# Altium PCB AD9288.PcbDoc
Units mil, origin at the board's own origin, x right, y up, seen from the top; angles counter-clockwise.
Board outline 2660 x 1500 mil, 2 copper layers (Top Layer, Bottom Layer); 37 components, 46 nets, 149 pads, 336 vias.
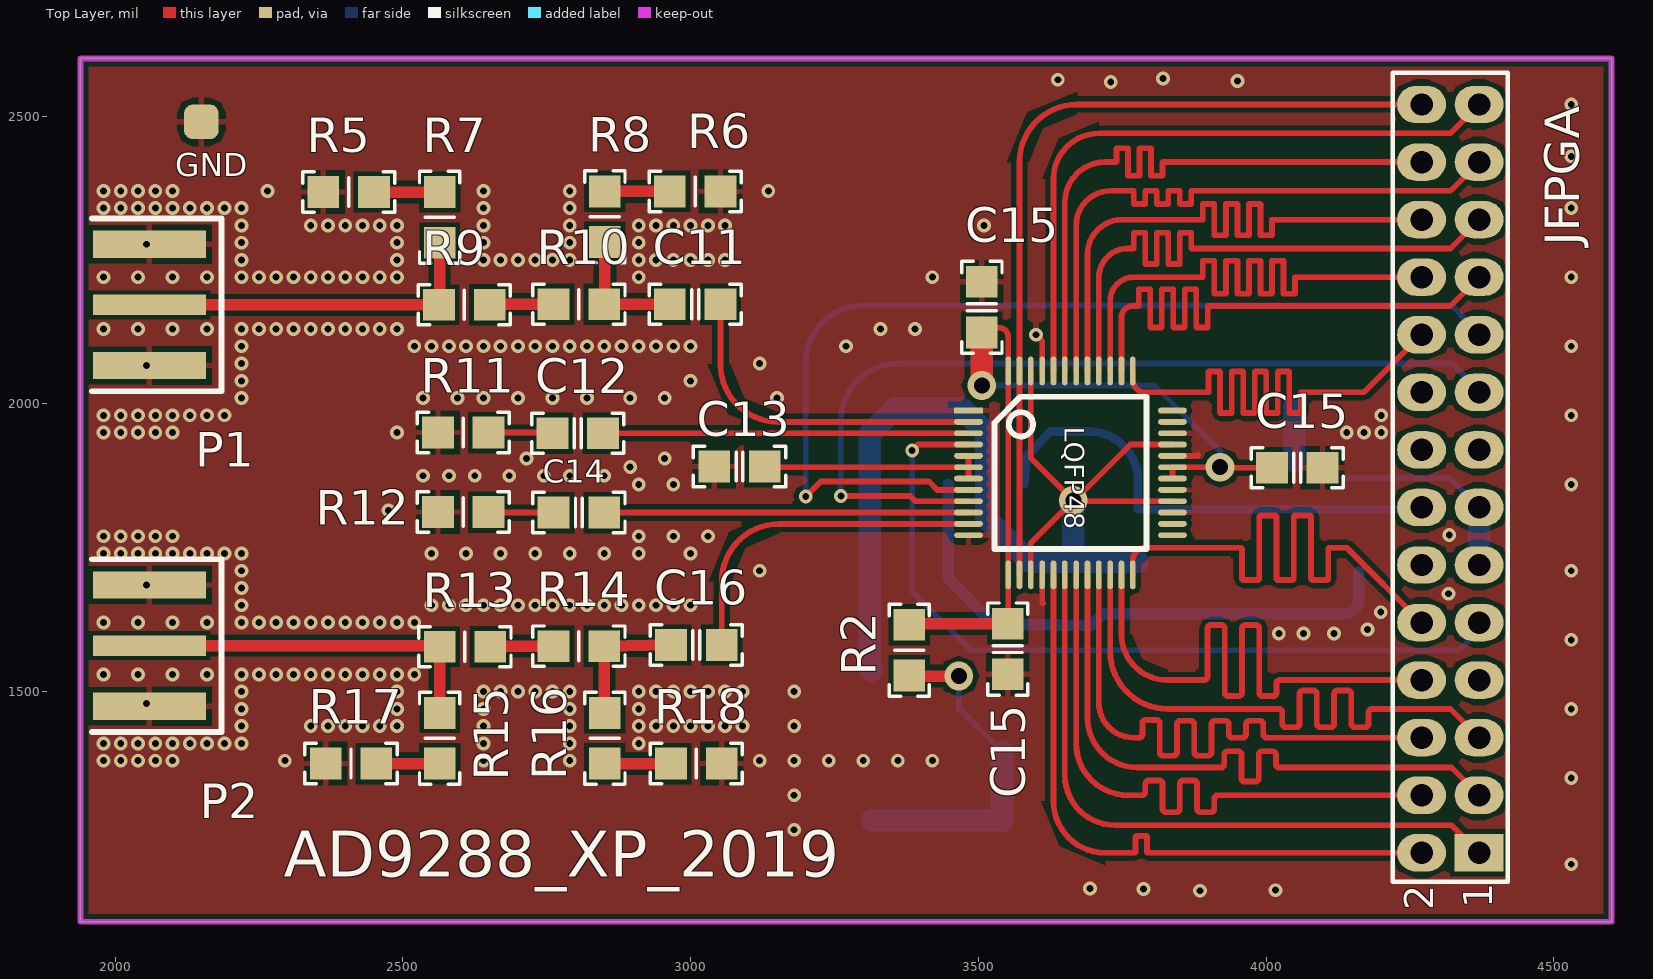
[diagram p0: Top Layer view]
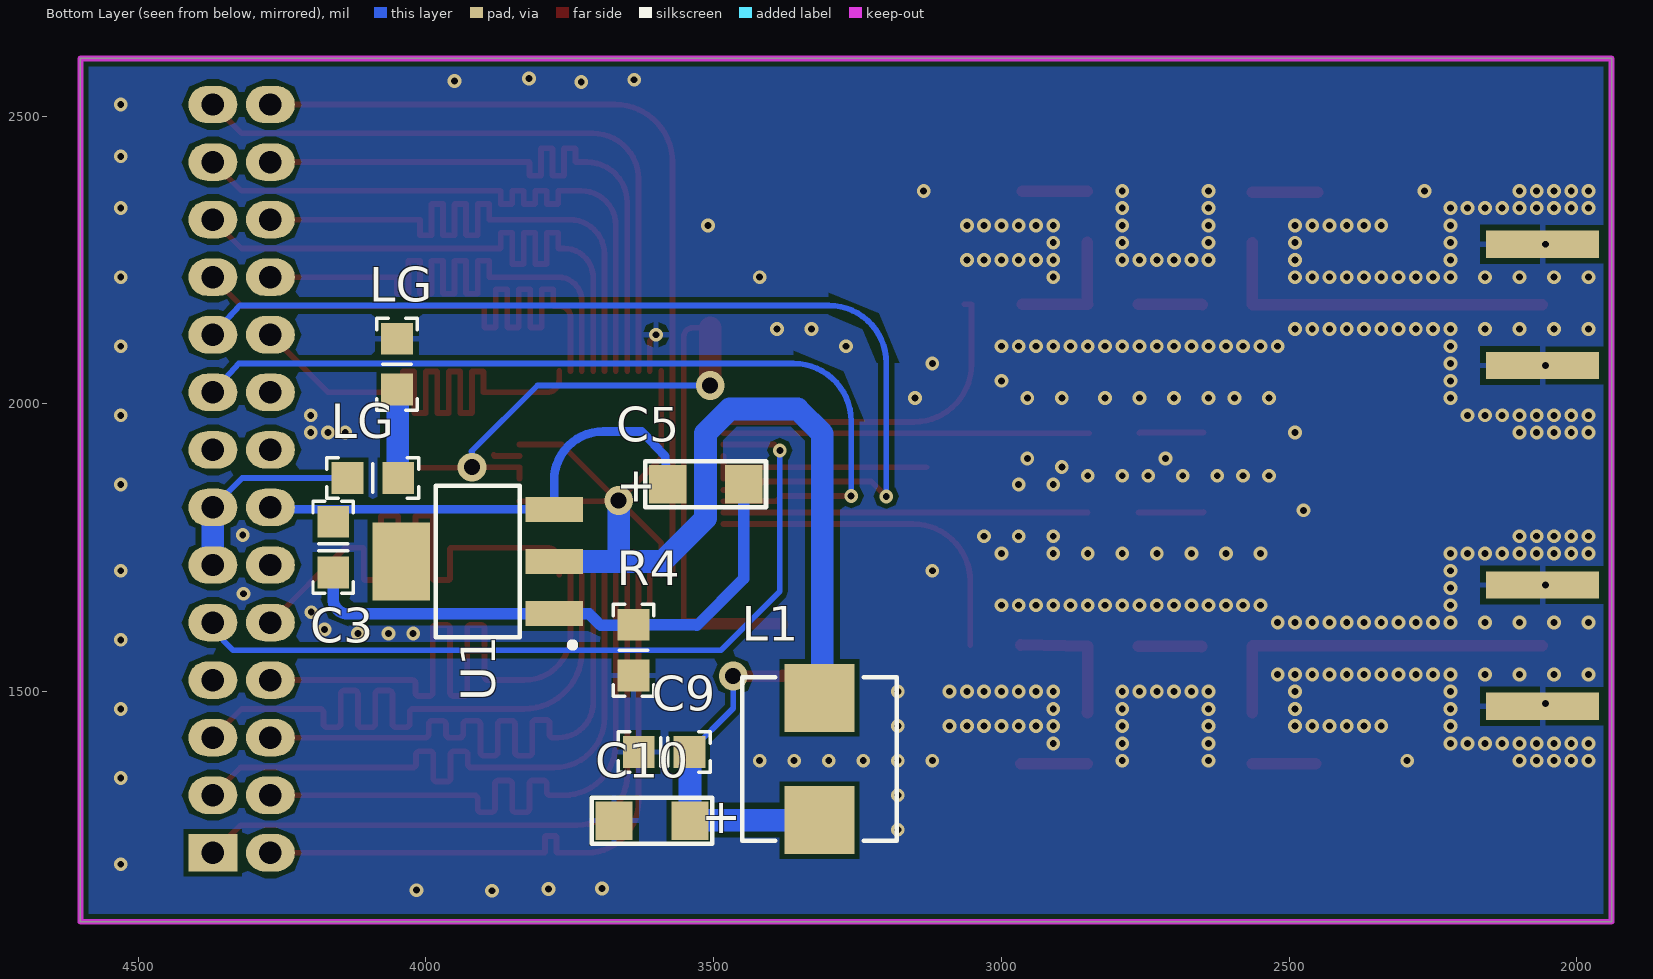
[diagram p1: Bottom Layer view, seen from below]
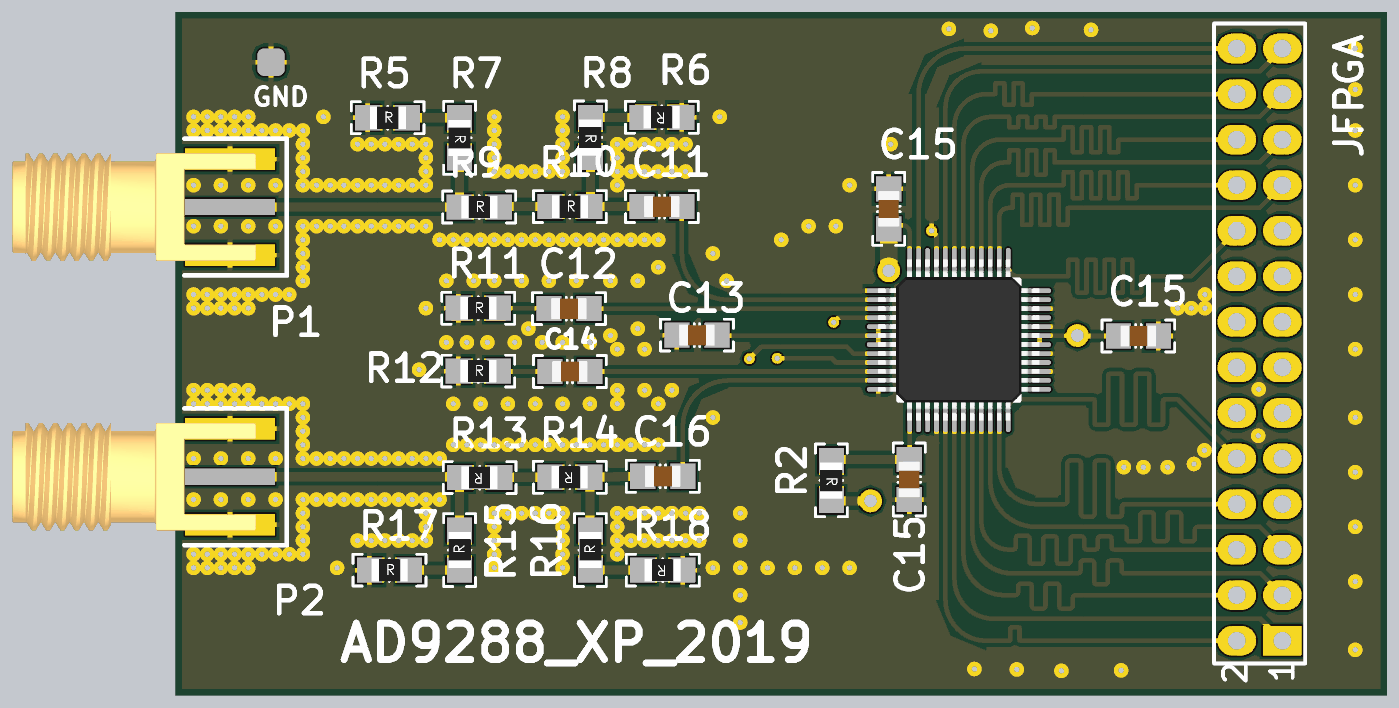
[diagram p2: 3D render of the assembled board from above, using the file's embedded part models]
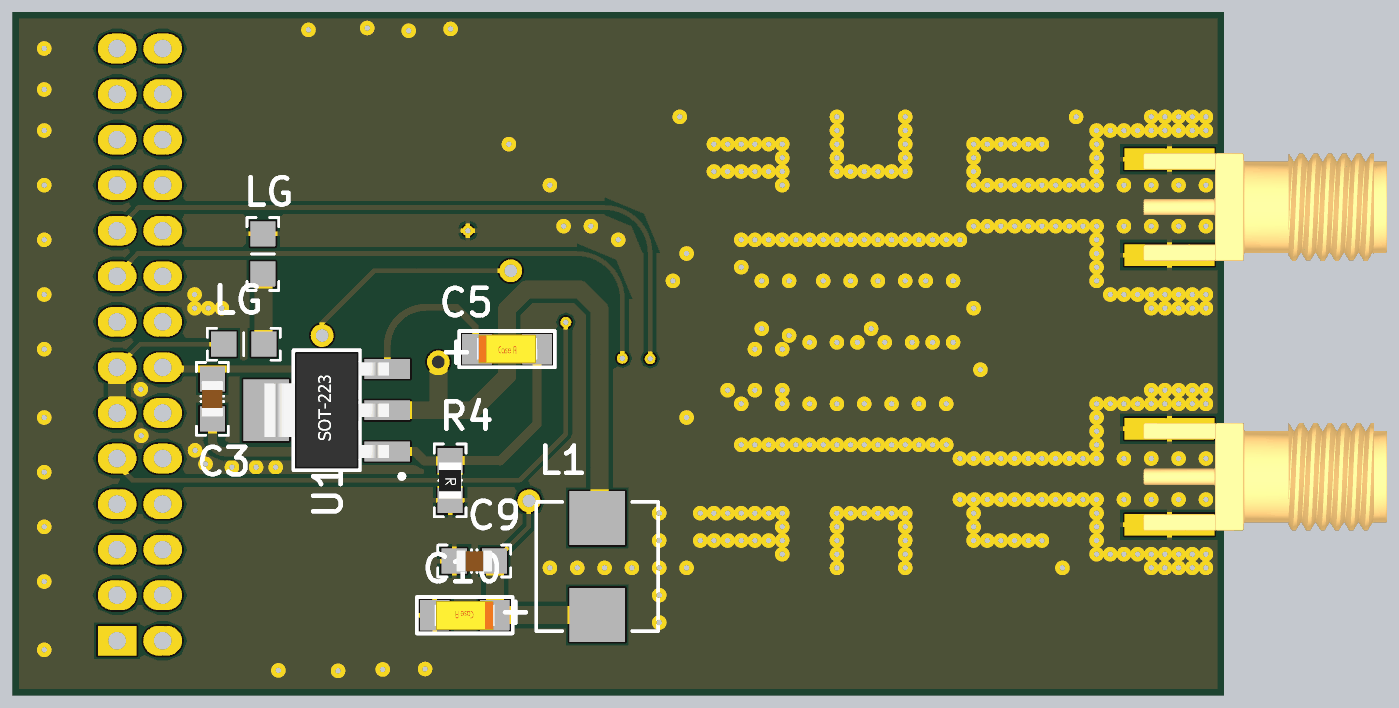
[diagram p3: 3D render of the assembled board from below, using the file's embedded part models]

## Layer stack, top to bottom
Top Solder: solder mask 0.4, Solder Resist, Dk 3.5
Top Layer: signal copper 1.4
Dielectric 1: dielectric 12.6, FR-4, Dk 4.8
Bottom Layer: signal copper 1.4
Bottom Solder: solder mask 0.4, Solder Resist, Dk 3.5

## Board outline
1940,1100 4600,1100 4600,2600 1940,2600

## Design rules (kind name [scope] priority, off if disabled: settings)
Clearance [All] p1: gap=8
Length "InNet('D6A') Or InNet('D7A')" [InNet('D7A')] p1: maxlimit=1138.2 minlimit=0
PolygonConnect [All] p1: connectstyle=Relief reliefconductorwidth=10 reliefentries=4 polygonreliefangle="90 Angle" airgapwidth=10
RoutingVias [All] p1: holewidth=28 width=50 viastyle="Through Hole" minholewidth=28 minwidth=50 maxholewidth=28 maxwidth=50
SolderMaskExpansion [All] p1: expansion=4
UnpouredPolygon [All] p1: allowunpoured=FALSE
Width [All] p1: maxlimit=78.74 minlimit=10 preferedwidth=10
29 further rules are at their usual default settings.

## Classes and differential pairs
component class AD9288: AD9288_XP_2019 C3 C5 C9 C10 C11 C12 C13 C14 C15 C16 JFPGA L1 LG P1 P2 R2 R4 R5 R6 R7 R8 R9 R10 R11 R12 R13 R14 R15 R16 R17 R18 U1

## Components (designator, comment, footprint, x,y, rotation, side; value= is the part's Value field where it differs from the comment)
AD9288_XP_2019 "AD9288" LQFP-48 3660,1880 r270 top (schematic designator U2)
C3 "10uf" 0805-CAP 4161,1751 r90 bottom
C5 "226" CAP_3216_A[1206] 3514,1860 r180 bottom
C9 "104" 0805-CAP 3586,1395 r180 bottom
C10 "226" CAP_3216_A[1206] 3607,1276 r0 bottom
C11 "104" 0805-CAP 3008,2173 r0 top
C12 "104" 0805-CAP 2804,1949 r0 top
C13 "104" 0805-CAP 3085,1891 r0 top
C14 "104" 0805-CAP 2806,1811 r0 top
C15 "104" 0805-CAP 3506,2168 r90 top
C15 "104" 0805-CAP 3551,1574 r270 top
C15 "104" 0805-CAP 4054,1889 r0 top
C16 "104" 0805-CAP 3010,1581 r0 top
GND "Comment" TP-1.52MM 2150,2490 r0 top
JFPGA "Header2x14" HEADER2X14 4320,1870 r90 top (schematic designator J?)
L1 "L-0630Power" IND-PWR-0630 3316,1383 r90 bottom
LG "10nH" 0805-IND 4050,2069 r270 bottom
LG "10nH" 0805-IND 4092,1871 r0 bottom
P1 "RF-SMA" RFCON_SMA-EDGE 2060,2172 r90 top
P2 "RF-SMA" RFCON_SMA-EDGE 2060,1580 r90 top
R2 "0" 0805-RES 3380,1572 r270 top
R4 "0" 0805-RES 3639,1572 r270 bottom
R5 "0" 0805-RES 2406,2368 r0 top
R6 "0" 0805-RES 3008,2369 r180 top
R7 "584" 0805-RES 2564,2324 r270 top
R8 "584" 0805-RES 2851,2325 r270 top
R9 "352" 0805-RES 2607,2172 r0 top
R10 "0" 0805-RES 2806,2173 r0 top
R11 "100" 0805-RES 2605,1950 r0 top
R12 "100" 0805-RES 2605,1812 r0 top
R13 "0" 0805-RES 2608,1578 r180 top
R14 "352" 0805-RES 2806,1579 r180 top
R15 "584" 0805-RES 2564,1419 r90 top
R16 "584" 0805-RES 2851,1419 r90 top
R17 "0" 0805-RES 2410,1375 r0 top
R18 "0" 0805-RES 3010,1375 r180 top
U1 "LM1117" SOT-223 3910,1726 r180 bottom

## Footprints (in the part's own frame and the unit in brackets; to place one, negate y for a bottom-side part, rotate by r counter-clockwise, add the part's x,y. Pads: shape width x height; smd on the part's side, far side on the other; paste and mask are expansions set on the pad)
0805-CAP [mm]
  rect 1.4x1.4 smd: 1(-1.118,0) 2(1.118,0)
  silkscreen extent -2.03,-0.89 2.03,0.89, body extent -1,-0.6 1,0.6, height 1.2
0805-IND [mm]
  rect 1.4x1.4 smd: 1(-1.118,0) 2(1.118,0)
  silkscreen extent -2.03,-0.89 2.03,0.89
0805-RES [mm]
  rect 1.4x1.4 smd: 1(-1.118,0) 2(1.118,0)
  silkscreen extent -2.03,-0.89 2.03,0.89, body extent -1.49,-0.7 1.51,0.7, height 0.49
CAP_3216_A[1206] [mil]
  rect 65x66.93 smd: 1(-66,0) 2(66,0)
  silkscreen extent -105,-40 105,40, body extent -67,-31 67,32, height 65
HEADER2X14 [mil]
  rect 65x85 hole 39: 1(-650,-50)
  oval 65x85 hole 39: 2(-650,50) 3(-550,-50) 4(-550,50) 5(-450,-50) 6(-450,50) 7(-350,-50) 8(-350,50) 9(-250,-50) 10(-250,50) 11(-150,-50) 12(-150,50) 13(-50,-50) 14(-50,50) 15(50,-50) 16(50,50) 17(150,-50) 18(150,50) 19(250,-50) 20(250,50) 21(350,-50) 22(350,50) 23(450,-50) 24(450,50) 25(550,-50) 26(550,50) 27(650,-50) 28(650,50)
  silkscreen extent -700,-100 705,100
IND-PWR-0630 [mm] "Precision Wire Wound Inductor, 2-Leads, Body 6.90x6.60mm, IPC Medium Density"
  rect 3x3.1 smd: 1(-2.7,0) 2(2.7,0)
  silkscreen extent -3.6,-3.4 3.6,3.4, body extent -3.6,-3.4 3.6,3.4, height 3
LQFP-48 [mm]
  rect 0.254x1.27 smd: 1(-2.75,-4.5)
  oval 0.254x1.27 smd: 2(-2.25,-4.5) 3(-1.75,-4.5) 4(-1.25,-4.5) 5(-0.75,-4.5) 6(-0.25,-4.5) 7(0.25,-4.5) 8(0.75,-4.5) 9(1.25,-4.5) 10(1.75,-4.5) 11(2.25,-4.5) 12(2.75,-4.5) 25(2.75,4.5) 26(2.25,4.5) 27(1.75,4.5) 28(1.25,4.5) 29(0.75,4.5) 30(0.25,4.5) 31(-0.25,4.5) 32(-0.75,4.5) 33(-1.25,4.5) 34(-1.75,4.5) 35(-2.25,4.5) 36(-2.75,4.5)
  oval 1.27x0.254 smd: 13(4.5,-2.75) 14(4.5,-2.25) 15(4.5,-1.75) 16(4.5,-1.25) 17(4.5,-0.75) 18(4.5,-0.25) 19(4.5,0.25) 20(4.5,0.75) 21(4.5,1.25) 22(4.5,1.75) 23(4.5,2.25) 24(4.5,2.75) 37(-4.5,2.75) 38(-4.5,2.25) 39(-4.5,1.75) 40(-4.5,1.25) 41(-4.5,0.75) 42(-4.5,0.25) 43(-4.5,-0.25) 44(-4.5,-0.75) 45(-4.5,-1.25) 46(-4.5,-1.75) 47(-4.5,-2.25) 48(-4.5,-2.75)
  silkscreen extent -3.36,-3.36 3.36,3.36, body extent -4.51,-4.5 4.49,4.5, height 1.6
RFCON_SMA-EDGE [mm]
  rect 0.9x5 smd: 1(0,0)
  rect 1.2x5 all layers, no hole: 2(-2.675,0) 2(2.675,0)
  silkscreen extent -3.81,-3.18 3.81,2.54, body extent -3,-1.46 3,12.14, height 1.25
SOT-223 [mm] "AMS1117"
  rect 2.54x1.1 smd: 1(3.375,-2.3) 2(3.375,0) 3(3.375,2.3)
  rect 2.54x3.45 smd: 4(-3.375,0)
  silkscreen extent -1.85,-3.81 4.31,3.35, body extent -3.48,-3.25 3.48,3.25, height 1.66
TP-1.52MM [mil]
  rrect50% 60x60 smd: 1(0,0)

## Part data
C3 C9 C11 C12 C13 C14 C15 C15 C15 C16: library part C0805
C5 C10: library part C-Tan, "Tantalum Cap"
L1: library part L-PWR-0630, "一体成型电感"
LG LG: library part L0805
R2 R4 R5 R6 R7 R8 R9 R10 R11 R12 R13 R14 R15 R16 R17 R18: library part R0805, "0805贴片电阻"
U1: library part LM1117_SOT_223

## Via types
v1: diameter 24, hole 12, Top Layer to Bottom Layer, 332 vias
v2: diameter 50, hole 28, Top Layer to Bottom Layer, 4 vias

## Nets (pads, with @x,y where several pads share a name; then routed paths per layer and width w, separated by ;. In a path a pad name is that pad's centre, name@x,y a point inside that pad or via, vN(x,y) a via of type N, cw(c..) or ccw(c..) an arc to the next point about the centre after c; other vN are vias at no path point)
3.3V: AD9288_XP_2019.15 AD9288_XP_2019.28 AD9288_XP_2019.33 AD9288_XP_2019.46 L1.2 U1.2 | length 1999.2
  Top Layer w10: AD9288_XP_2019.15 3591.1,1758.1 v2(3665,1832) ; AD9288_XP_2019.46 3591.1,1905.9 v2(3665,1832) ; AD9288_XP_2019.28 3689.21,1830.79 3689,1831 v2@3666,1831 ; AD9288_XP_2019.33 3764.21,1929.21 v2@3666,1831 ; v2(3665,1832) v2@3666,1831
  Bottom Layer w39.37: L1.2@3315,1537.3 3311,1541.3 3311,1948 3354,1991 3472,1991 3514,1949 3514,1801 3589,1726 3664,1726 ; v2(3665,1832) 3665,1727 3664,1726 ; U1.2 3664,1726
+12.5VV: C3.2 C5.1 JFPGA.14 U1.3 | length 853.9
  Bottom Layer w15: C5.1 3584,1909 3625,1952 3692,1952 cw(c3692,1866.87) 3777.13,1866.87 U1.3 4266.55,1816.55 JFPGA.14
AGND: C3.1 C5.2 R4.1 U1.1 | length 981.1
  Bottom Layer w20: C5.2 3448,1696 3529,1615 3530,1616 R4.1 3640,1615 3696,1615 3716.45,1635.45 U1.1 3777.13,1635 4135,1635 ccw(c4135,1661) 4161,1661 C3.1
D0A: AD9288_XP_2019.37 JFPGA.20 | length 1138.9
  Top Layer w10: AD9288_XP_2019.37 3768.27,2041.73 ccw(c3790,2041.73) 3790,2020 3890,2020 3899,2020 ccw(c3899,2021) 3900,2021 3900,2054.98 cw(c3901,2054.98) 3901,2055.98 3919,2055.98 cw(c3919,2054.98) 3920,2054.98 3920,2020 3920,1985.02 ccw(c3921,1985.02) 3921,1984.02 3939,1984.02 ccw(c3939,1985.02) 3940,1985.02 3940,2020 3940,2054.98 cw(c3941,2054.98) 3941,2055.98 3959,2055.98 cw(c3959,2054.98) 3960,2054.98 3960,2020 3960,1985.02 ccw(c3961,1985.02) 3961,1984.02 3979,1984.02 ccw(c3979,1985.02) 3980,1985.02 3980,2020 3980,2054.98 cw(c3981,2054.98) 3981,2055.98 3999,2055.98 cw(c3999,2054.98) 4000,2054.98 4000,2020 4000,1985.02 ccw(c4001,1985.02) 4001,1984.02 4019,1984.02 ccw(c4019,1985.02) 4020,1985.02 4020,2020 4020,2054.98 cw(c4021,2054.98) 4021,2055.98 4039,2055.98 cw(c4039,2054.98) 4040,2054.98 4040,2020 4040,1985.02 ccw(c4041,1985.02) 4041,1984.02 4059,1984.02 ccw(c4059,1985.02) 4060,1985.02 4060,2019 cw(c4061,2019) 4061,2020 4120,2020 4170,2020 JFPGA.20
D0B: AD9288_XP_2019.24 JFPGA.10 | length 1138.9
  Top Layer w10: AD9288_XP_2019.24 3768.27,1728.27 cw(c3790,1728.27) 3790,1750 3894,1750 3955,1750 cw(c3955,1747) 3958,1747 3958,1696.9 ccw(c3961,1696.9) 3961,1693.9 3985,1693.9 ccw(c3985,1696.9) 3988,1696.9 3988,1750 3988,1803.1 cw(c3991,1803.1) 3991,1806.1 4015,1806.1 cw(c4015,1803.1) 4018,1803.1 4018,1750 4018,1696.9 ccw(c4021,1696.9) 4021,1693.9 4045,1693.9 ccw(c4045,1696.9) 4048,1696.9 4048,1750 4048,1803.1 cw(c4051,1803.1) 4051,1806.1 4075,1806.1 cw(c4075,1803.1) 4078,1803.1 4078,1750 4078,1696.9 ccw(c4081,1696.9) 4081,1693.9 4105,1693.9 ccw(c4105,1696.9) 4108,1696.9 4108,1747 cw(c4111,1747) 4111,1750 4123,1750 4140,1750 JFPGA.10
D1A: AD9288_XP_2019.38 JFPGA.21 | length 1138.9
  Top Layer w10: AD9288_XP_2019.38 3748.58,2150 cw(c3768.58,2150) 3768.58,2170 3777.58,2170 ccw(c3777.58,2171) 3778.58,2171 3778.58,2198.22 cw(c3779.58,2198.22) 3779.58,2199.22 3797.58,2199.22 cw(c3797.58,2198.22) 3798.58,2198.22 3798.58,2170 3798.58,2133.79 ccw(c3799.58,2133.79) 3799.58,2132.79 3817.58,2132.79 ccw(c3817.58,2133.79) 3818.58,2133.79 3818.58,2170 3818.58,2198.22 cw(c3819.58,2198.22) 3819.58,2199.22 3837.58,2199.22 cw(c3837.58,2198.22) 3838.58,2198.22 3838.58,2170 3838.58,2133.79 ccw(c3839.58,2133.79) 3839.58,2132.79 3857.58,2132.79 ccw(c3857.58,2133.79) 3858.58,2133.79 3858.58,2170 3858.58,2198.22 cw(c3859.58,2198.22) 3859.58,2199.22 3877.58,2199.22 cw(c3877.58,2198.22) 3878.58,2198.22 3878.58,2170 3878.58,2133.79 ccw(c3879.58,2133.79) 3879.58,2132.79 3897.58,2132.79 ccw(c3897.58,2133.79) 3898.58,2133.79 3898.58,2169 cw(c3899.58,2169) 3899.58,2170 4110,2170 4320,2170 JFPGA.21
D1B: AD9288_XP_2019.23 JFPGA.8 | length 1138.9
  Top Layer w10: AD9288_XP_2019.23 3748.58,1600 ccw(c3828.58,1600) 3828.58,1520 3883,1520 3892,1520 ccw(c3892,1526) 3898,1526 3898,1609.79 cw(c3904,1609.79) 3904,1615.79 3922,1615.79 cw(c3922,1609.79) 3928,1609.79 3928,1520 3928,1498.21 ccw(c3934,1498.21) 3934,1492.21 3952,1492.21 ccw(c3952,1498.21) 3958,1498.21 3958,1520 3958,1609.79 cw(c3964,1609.79) 3964,1615.79 3982,1615.79 cw(c3982,1609.79) 3988,1609.79 3988,1520 3988,1498.21 ccw(c3994,1498.21) 3994,1492.21 4012,1492.21 ccw(c4012,1498.21) 4018,1498.21 4018,1515 cw(c4023,1515) 4023,1520 JFPGA.8
D2A: AD9288_XP_2019.39 JFPGA.22 | length 1138.9
  Top Layer w10: AD9288_XP_2019.39 3728.9,2178.9 cw(c3770,2178.9) 3770,2220 3880,2220 3889,2220 ccw(c3889,2221) 3890,2221 3890,2247.77 cw(c3891,2247.77) 3891,2248.77 3909,2248.77 cw(c3909,2247.77) 3910,2247.77 3910,2220 3910,2192.23 ccw(c3911,2192.23) 3911,2191.23 3929,2191.23 ccw(c3929,2192.23) 3930,2192.23 3930,2220 3930,2247.77 cw(c3931,2247.77) 3931,2248.77 3949,2248.77 cw(c3949,2247.77) 3950,2247.77 3950,2220 3950,2192.23 ccw(c3951,2192.23) 3951,2191.23 3969,2191.23 ccw(c3969,2192.23) 3970,2192.23 3970,2220 3970,2247.77 cw(c3971,2247.77) 3971,2248.77 3989,2248.77 cw(c3989,2247.77) 3990,2247.77 3990,2220 3990,2192.23 ccw(c3991,2192.23) 3991,2191.23 4009,2191.23 ccw(c4009,2192.23) 4010,2192.23 4010,2220 4010,2247.77 cw(c4011,2247.77) 4011,2248.77 4029,2248.77 cw(c4029,2247.77) 4030,2247.77 4030,2220 4030,2192.23 ccw(c4031,2192.23) 4031,2191.23 4049,2191.23 ccw(c4049,2192.23) 4050,2192.23 4050,2219 cw(c4051,2219) 4051,2220 4090,2220 JFPGA.22
D2B: AD9288_XP_2019.22 JFPGA.5 | length 1138.9
  Top Layer w10: AD9288_XP_2019.22 3728.9,1570 ccw(c3828.9,1570) 3828.9,1470 4014,1470 4022,1470 cw(c4022,1464) 4028,1464 4028,1444.19 ccw(c4034,1444.19) 4034,1438.19 4052,1438.19 ccw(c4052,1444.19) 4058,1444.19 4058,1470 4058,1495.81 cw(c4064,1495.81) 4064,1501.81 4082,1501.81 cw(c4082,1495.81) 4088,1495.81 4088,1470 4088,1444.19 ccw(c4094,1444.19) 4094,1438.19 4112,1438.19 ccw(c4112,1444.19) 4118,1444.19 4118,1470 4118,1495.81 cw(c4124,1495.81) 4124,1501.81 4142,1501.81 cw(c4142,1495.81) 4148,1495.81 4148,1470 4148,1444.19 ccw(c4154,1444.19) 4154,1438.19 4172,1438.19 ccw(c4172,1444.19) 4178,1444.19 4178,1464 cw(c4184,1464) 4184,1470 4193,1470 4320,1470 JFPGA.5
D3A: AD9288_XP_2019.40 JFPGA.23 | length 1138.9
  Top Layer w10: AD9288_XP_2019.40 3709.21,2219.21 cw(c3760,2219.21) 3760,2270 3769,2270 ccw(c3769,2271) 3770,2271 3770,2296.16 cw(c3771,2296.16) 3771,2297.16 3789,2297.16 cw(c3789,2296.16) 3790,2296.16 3790,2270 3790,2243.84 ccw(c3791,2243.84) 3791,2242.84 3809,2242.84 ccw(c3809,2243.84) 3810,2243.84 3810,2270 3810,2296.16 cw(c3811,2296.16) 3811,2297.16 3829,2297.16 cw(c3829,2296.16) 3830,2296.16 3830,2270 3830,2243.84 ccw(c3831,2243.84) 3831,2242.84 3849,2242.84 ccw(c3849,2243.84) 3850,2243.84 3850,2270 3850,2296.16 cw(c3851,2296.16) 3851,2297.16 3869,2297.16 cw(c3869,2296.16) 3870,2296.16 3870,2271 ccw(c3871,2271) 3871,2270 4060,2270 4320,2270 JFPGA.23
D3B: AD9288_XP_2019.21 JFPGA.6 | length 1138.9
  Top Layer w10: AD9288_XP_2019.21 3709.21,1480.79 ccw(c3770,1480.79) 3770,1420 3779,1420 ccw(c3779,1426) 3785,1426 3785,1444.89 cw(c3791,1444.89) 3791,1450.89 3809,1450.89 cw(c3809,1444.89) 3815,1444.89 3815,1420 3815,1394.72 ccw(c3821,1394.72) 3821,1388.72 3839,1388.72 ccw(c3839,1394.72) 3845,1394.72 3845,1420 3845,1443.28 cw(c3851,1443.28) 3851,1449.28 3869,1449.28 cw(c3869,1443.28) 3875,1443.28 3875,1420 3875,1394.72 ccw(c3881,1394.72) 3881,1388.72 3899,1388.72 ccw(c3899,1394.72) 3905,1394.72 3905,1420 3905,1443.28 cw(c3911,1443.28) 3911,1449.28 3929,1449.28 cw(c3929,1443.28) 3935,1443.28 3935,1426 ccw(c3941,1426) 3941,1420 3959,1420 ccw(c3959,1426) 3965,1426 3965,1443.28 cw(c3971,1443.28) 3971,1449.28 3989,1449.28 cw(c3989,1443.28) 3995,1443.28 3995,1426 ccw(c4001,1426) 4001,1420 4068,1420 JFPGA.6
D4A: AD9288_XP_2019.41 JFPGA.24 | length 1138.9
  Top Layer w10: AD9288_XP_2019.41 3689.53,2259.53 cw(c3750,2259.53) 3750,2320 3880,2320 3889,2320 ccw(c3889,2321) 3890,2321 3890,2346.3 cw(c3891,2346.3) 3891,2347.3 3909,2347.3 cw(c3909,2346.3) 3910,2346.3 3910,2320 3910,2293.7 ccw(c3911,2293.7) 3911,2292.7 3929,2292.7 ccw(c3929,2293.7) 3930,2293.7 3930,2320 3930,2346.3 cw(c3931,2346.3) 3931,2347.3 3949,2347.3 cw(c3949,2346.3) 3950,2346.3 3950,2320 3950,2293.7 ccw(c3951,2293.7) 3951,2292.7 3969,2292.7 ccw(c3969,2293.7) 3970,2293.7 3970,2320 3970,2346.3 cw(c3971,2346.3) 3971,2347.3 3989,2347.3 cw(c3989,2346.3) 3990,2346.3 3990,2320 3990,2293.7 ccw(c3991,2293.7) 3991,2292.7 4009,2292.7 ccw(c4009,2293.7) 4010,2293.7 4010,2319 cw(c4011,2319) 4011,2320 4030,2320 JFPGA.24
D4B: AD9288_XP_2019.20 JFPGA.3 | length 1138.9
  Top Layer w10: AD9288_XP_2019.20 3689.53,1454.97 ccw(c3776.5,1454.97) 3776.5,1368 3912,1368 3921,1368 ccw(c3921,1374) 3927,1374 3927,1390.28 cw(c3933,1390.28) 3933,1396.28 3951,1396.28 cw(c3951,1390.28) 3957,1390.28 3957,1368 3957,1349.72 ccw(c3963,1349.72) 3963,1343.72 3981,1343.72 ccw(c3981,1349.72) 3987,1349.72 3987,1368 3987,1390.28 cw(c3993,1390.28) 3993,1396.28 4011,1396.28 cw(c4011,1390.28) 4017,1390.28 4017,1374 ccw(c4023,1374) 4023,1368 4089,1368 4322,1368 JFPGA.3
D5A: AD9288_XP_2019.42 JFPGA.25 | length 1138.9
  Top Layer w10: AD9288_XP_2019.42 3669.84,2309.84 cw(c3730,2309.84) 3730,2370 3740,2370 3750,2370 3769,2370 cw(c3769,2369) 3770,2369 3770,2348.3 ccw(c3771,2348.3) 3771,2347.3 3789,2347.3 ccw(c3789,2348.3) 3790,2348.3 3790,2369 cw(c3791,2369) 3791,2370 3809,2370 cw(c3809,2369) 3810,2369 3810,2348.3 ccw(c3811,2348.3) 3811,2347.3 3829,2347.3 ccw(c3829,2348.3) 3830,2348.3 3830,2369 cw(c3831,2369) 3831,2370 3849,2370 cw(c3849,2369) 3850,2369 3850,2348.3 ccw(c3851,2348.3) 3851,2347.3 3869,2347.3 ccw(c3869,2348.3) 3870,2348.3 3870,2369 cw(c3871,2369) 3871,2370 3980,2370 4320,2370 JFPGA.25
D5B: AD9288_XP_2019.19 JFPGA.4 | length 1138.9
  Top Layer w10: AD9288_XP_2019.19 3669.84,1410.16 ccw(c3760,1410.16) 3760,1320 3775,1320 3784,1320 ccw(c3784,1326) 3790,1326 3790,1339.55 cw(c3796,1339.55) 3796,1345.55 3814,1345.55 cw(c3814,1339.55) 3820,1339.55 3820,1320 3820,1296.45 ccw(c3826,1296.45) 3826,1290.45 3844,1290.45 ccw(c3844,1296.45) 3850,1296.45 3850,1320 3850,1339.55 cw(c3856,1339.55) 3856,1345.55 3874,1345.55 cw(c3874,1339.55) 3880,1339.55 3880,1320 3880,1296.45 ccw(c3886,1296.45) 3886,1290.45 3904,1290.45 ccw(c3904,1296.45) 3910,1296.45 3910,1314 cw(c3916,1314) 3916,1320 3948,1320 JFPGA.4
D6A: AD9288_XP_2019.43 JFPGA.26 | length 1138.9
  Top Layer w10: AD9288_XP_2019.43 3650.16,2350 cw(c3720.16,2350) 3720.16,2420 3730,2420 3739,2420 ccw(c3739,2421) 3740,2421 3740,2442.82 cw(c3741,2442.82) 3741,2443.82 3759,2443.82 cw(c3759,2442.82) 3760,2442.82 3760,2420 3760,2397.18 ccw(c3761,2397.18) 3761,2396.18 3779,2396.18 ccw(c3779,2397.18) 3780,2397.18 3780,2420 3780,2442.82 cw(c3781,2442.82) 3781,2443.82 3799,2443.82 cw(c3799,2442.82) 3800,2442.82 3800,2420 3800,2397.18 ccw(c3801,2397.18) 3801,2396.18 3819,2396.18 ccw(c3819,2397.18) 3820,2397.18 3820,2419 cw(c3821,2419) 3821,2420 3930,2420 JFPGA.26
D6B: AD9288_XP_2019.18 JFPGA.1 | length 1137.2
  Top Layer w10: AD9288_XP_2019.18 3650.16,1355 ccw(c3737.16,1355) 3737.16,1268 4322,1268 JFPGA.1
D7A: AD9288_XP_2019.44 JFPGA.27 | length 1138.9
  Top Layer w10: AD9288_XP_2019.44 3630.47,2390.47 cw(c3710,2390.47) 3710,2470 4320,2470 JFPGA.27
D7B: AD9288_XP_2019.17 JFPGA.2 | length 1138.9
  Top Layer w10: AD9288_XP_2019.17 3630.47,1309.53 ccw(c3720,1309.53) 3720,1220 3763,1220 3771,1220 ccw(c3771,1222) 3773,1222 3773,1247.22 cw(c3775,1247.22) 3775,1249.22 3791,1249.22 cw(c3791,1247.22) 3793,1247.22 3793,1222 ccw(c3795,1222) 3795,1220 3907,1220 JFPGA.2
DFS: AD9288_XP_2019.4 JFPGA.9 | length 1401.8
  Top Layer w10: v1(3385,1919) 3395.21,1929.21 AD9288_XP_2019.4
  Bottom Layer w10: v1(3385,1919) 3385,1674 3487,1572 4335,1572 4370,1607 JFPGA.9
DGND: AD9288_XP_2019.1 AD9288_XP_2019.12 AD9288_XP_2019.16 AD9288_XP_2019.27 AD9288_XP_2019.29 AD9288_XP_2019.32 AD9288_XP_2019.34 AD9288_XP_2019.45 C9.1 C10.2 C13.1 C15.2 GND.1 LG.1@4050,2113 P1.2 P2.2 R4.2 R5.1 R6.1 R11.1 R12.1 R17.1 R18.1 | length 162.7
  Top Layer w10: v1(3600,2120) 3610.79,2109.21 AD9288_XP_2019.45 ; AD9288_XP_2019.16 3610.79,1655.24 3612.47,1653.56 ; AD9288_XP_2019.32 3880.53,1909.53 3882,1911
  other v1: 3885,1154 4016,1155 3787,1157 3694,1158 4530,1200 3180,1260 3180,1320 4530,1350 1980,1380 2010,1380 2040,1380 2070,1380 2070,1380 2100,1380 2295,1380 2640,1380 2790,1380 3120,1380 3180,1380 3240,1380 3300,1380 3360,1380 3420,1380 1980,1410 2010,1410 2040,1410 2070,1410 2100,1410 2130,1410 2160,1410 2190,1410 2220,1410 2640,1410 2790,1410 2910,1410 2220,1440 2340,1440 2370,1440 2400,1440 2430,1440 2460,1440 2490,1440 2640,1440 2790,1440 2910,1440 2940,1440 2970,1440 3000,1440 3030,1440 3060,1440 3090,1440 3180,1440 2220,1470 2490,1470 2640,1470 2790,1470 2910,1470 4530,1470 2055,1479.68 2220,1500 2490,1500 2640,1500 2670,1500 2700,1500 2730,1500 2760,1500 2790,1500 2910,1500 2940,1500 2970,1500 3000,1500 3030,1500 3060,1500 3090,1500 3180,1500 1980,1530 2040,1530 2100,1530 2160,1530 2220,1530 2250,1530 2280,1530 2310,1530 2340,1530 2340,1530 2370,1530 2400,1530 2400,1530 2430,1530 2460,1530 2490,1530 2520,1530 4530,1590 4022,1601 4065,1601 4118,1601 4176,1608 1980,1620 2040,1620 2100,1620 2160,1620 2220,1620 2250,1620 2280,1620 2310,1620 2340,1620 2370,1620 2400,1620 2430,1620 2460,1620 2490,1620 2520,1620 4199,1638 2220,1650 2550,1650 2580,1650 2610,1650 2640,1650 2670,1650 2700,1650 2730,1650 2760,1650 2790,1650 2820,1650 2850,1650 2880,1650 2910,1650 2940,1650 2970,1650 3000,1650 4317,1670 2220,1680 2055,1685.31 2220,1710 3120,1710 4530,1710 1980,1740 2010,1740 2040,1740 2070,1740 2100,1740 2130,1740 2160,1740 2190,1740 2220,1740 2550,1740 2610,1740 2670,1740 2730,1740 2790,1740 2850,1740 2910,1740 3000,1740 1980,1770 2010,1770 2040,1770 2070,1770 2100,1770 2910,1770 2970,1770 3030,1770 4318,1772 2475,1815 2910,1860 2970,1860 4530,1860 2535,1875 2580,1875 2625,1875 2685,1875 2745,1875 2790,1875 2850,1875 2895,1890 2715,1905 2955,1905 1980,1950 2010,1950 2040,1950 2070,1950 2100,1950 2490,1950 4140,1950 4170,1950 4200,1950 1980,1980 2010,1980 2040,1980 2070,1980 2100,1980 2130,1980 2160,1980 2190,1980 4200,1980 4530,1980 2220,2010 2535,2010 2595,2010 2640,2010 2700,2010 2760,2010 2820,2010 2895,2010 2955,2010 3150,2010 2220,2040 3000,2040 2055,2066.68 2220,2070 3120,2070 2220,2100 2520,2100 2550,2100 2580,2100 2610,2100 2640,2100 2670,2100 2700,2100 2730,2100 2760,2100 2790,2100 2820,2100 2850,2100 2850,2100 2880,2100 2910,2100 2940,2100 2970,2100 3000,2100 3270,2100 4530,2100 1980,2130 2040,2130 2100,2130 2160,2130 2220,2130 2250,2130 2280,2130 2310,2130 2340,2130 2370,2130 2400,2130 2430,2130 2460,2130 2490,2130 3330,2130 3390,2130 1980,2220 2040,2220 2100,2220 2160,2220 2220,2220 2250,2220 2280,2220 2310,2220 2340,2220 2370,2220 2400,2220 2430,2220 2460,2220 2490,2220 2910,2220 3420,2220 4530,2220 2220,2250 2490,2250 2640,2250 2670,2250 2700,2250 2730,2250 2760,2250 2790,2250 2910,2250 2940,2250 2970,2250 3000,2250 3030,2250 3030,2250 3060,2250 2055,2277.31 2220,2280 2490,2280 2640,2280 2790,2280 2910,2280 2220,2310 2340,2310 2370,2310 2400,2310 2430,2310 2460,2310 2490,2310 2640,2310 2790,2310 2910,2310 2940,2310 2970,2310 3000,2310 3030,2310 3060,2310 3510,2310 1980,2340 2010,2340 2040,2340 2070,2340 2100,2340 2130,2340 2160,2340 2190,2340 2220,2340 2640,2340 2790,2340 4530,2340 1980,2370 2010,2370 2040,2370 2070,2370 2100,2370 2265,2370 2640,2370 2790,2370 3135,2370 4530,2430 4530,2520 3730,2559 3950,2561 3638,2563 3821,2565
DGNDD: JFPGA.11 JFPGA.13 LG.2@4136,1871 | length 355.1
  Bottom Layer w10: LG.2@4136,1871 4319,1871 4325,1865 JFPGA.13
  Bottom Layer w39.37: JFPGA.11 JFPGA.13
ENCA: AD9288_XP_2019.14 AD9288_XP_2019.47 JFPGA.28 | length 1472.8
  Top Layer w10: AD9288_XP_2019.14 AD9288_XP_2019.47 3571.42,2420 cw(c3671.42,2420) 3671.42,2520 JFPGA.28
NC: JFPGA.18
NetC9_2: C9.2 C10.1 L1.1 R2.2 | length 594.8
  Top Layer w20: R2.2 ccw(c3381,1528) 3381,1527 v2(3466,1527)
  Bottom Layer w10: v2(3466,1527) 3466,1471 C9.2
  Bottom Layer w39.37: L1.1 3540.3,1276.7 C10.1 3541,1394 C9.2
NetC11_1: C11.1 R8.2 R10.2 | length 222.4
  Top Layer w20: R8.2 2851,2174 R10.2 C11.1
NetC11_2: AD9288_XP_2019.2 C11.2 | length 604.9
  Top Layer w10: C11.2@3064.58,2173 C11.2 3052,2068.58 ccw(c3152,2068.58) 3152,1968.58 AD9288_XP_2019.2
NetC12_1: C12.1 R11.2 | length 111.6
  Top Layer w10: R11.2 2759,1950 cw(c2759,1949) C12.1
NetC12_2: AD9288_XP_2019.3 C12.2 | length 634.9
  Top Layer w10: C12.2 2848,1948.9 AD9288_XP_2019.3
NetC13_2: AD9288_XP_2019.5 AD9288_XP_2019.6 AD9288_XP_2019.7 C13.2 | length 392.2
  Top Layer w10: C13.2@3130,1889.84 AD9288_XP_2019.6 ; AD9288_XP_2019.7 AD9288_XP_2019.6 ; AD9288_XP_2019.5 AD9288_XP_2019.6
NetC14_1: C14.1 R12.2 | length 113.6
  Top Layer w10: R12.2 ccw(c2650,1812) 2650,1811 C14.1
NetC14_2: AD9288_XP_2019.10 C14.2 | length 632.9
  Top Layer w10: C14.2 2850,1811.1 AD9288_XP_2019.10
NetC16_1: C16.1 R14.1 R16.2 | length 232.6
  Top Layer w20: R16.2 cw(c2851,1464) 2850,1464 R14.1 C16.1
NetC16_2: AD9288_XP_2019.11 C16.2 | length 596.3
  Top Layer w10: C16.2 3054,1691.42 cw(c3154,1691.42) 3154,1791.42 AD9288_XP_2019.11
NetLG_1: LG.1@4048,1871 LG.2@4050,2025 | length 97
  Bottom Layer w39.37: 4049,1900 4049,1997
NetP1_1: P1.1 R7.2 R9.1 | length 611.4
  Top Layer w20: P1.1 R9.1 2564,2173 R7.2
NetP2_1: P2.1 R13.2 R15.2 | length 620.1
  Top Layer w20: P2.1 2562,1580 cw(c2562,1578) R13.2 R15.2
NetR5_2: R5.2 R7.1 | length 114
  Top Layer w20: R5.2 R7.1
NetR6_2: R6.2 R8.1 | length 113
  Top Layer w20: R8.1 R6.2
NetR9_2: R9.2 R10.1 | length 111.4
  Top Layer w20: R9.2 2652,2173 R10.1
NetR13_1: R13.1 R14.2 | length 110.6
  Top Layer w20: R13.1 cw(c2653,1578) 2653,1579 R14.2
NetR15_1: R15.1 R17.2 | length 110
  Top Layer w20: R17.2 R15.1
NetR16_1: R16.1 R18.2 | length 115
  Top Layer w20: R16.1 R18.2
S1: AD9288_XP_2019.8 JFPGA.19 | length 1781.1
  Top Layer w10: v1(3200,1839) 3226,1865 3414,1865 3428.53,1850.47 AD9288_XP_2019.8
  Bottom Layer w10: v1(3200,1839) 3200,2071 cw(c3300,2071) 3300,2171 4323,2171 JFPGA.19
S2: AD9288_XP_2019.9 JFPGA.17 | length 1544
  Top Layer w10: v1(3261,1840) 3381,1840 3390.21,1830.79 AD9288_XP_2019.9
  Bottom Layer w10: v1(3261,1840) 3261,1970 cw(c3361,1970) 3361,2070 4325,2070 JFPGA.17
VD: AD9288_XP_2019.13 AD9288_XP_2019.30 AD9288_XP_2019.31 AD9288_XP_2019.48 C15.1 R2.1 | length 1508.9
  Top Layer w10: C15.1@3506,2132 3536.73,2132 cw(c3536.73,2117) 3551.73,2117 AD9288_XP_2019.48 AD9288_XP_2019.13 3551.73,1618.73 cw(c3551,1618.73) C15.1@3551,1618 ; AD9288_XP_2019.30 AD9288_XP_2019.31 3837.32,1890 v2(3920,1890) 3921,1889 C15.1@4010,1889
  Top Layer w20: R2.1 cw(c3382,1616) 3382,1618 C15.1@3551,1618
  Top Layer w39.37: v2(3506,2032) 3506,2124 C15.1@3506,2132
  Bottom Layer w10: v2(3506,2032) 3806,2032 3921,1917 3920,1916 v2(3920,1890)
pads on no net: AD9288_XP_2019.25 AD9288_XP_2019.26 AD9288_XP_2019.35 AD9288_XP_2019.36 JFPGA.7 JFPGA.12 JFPGA.15 JFPGA.16 U1.4

## Polygon pours and split planes (outlines as drawn)
DGND on Top Layer "GND" (solid, remove dead copper, pour order 2): 1940,2600 4600,2600 4600,1100 1940,1100
DGND on Bottom Layer "GND" (solid, remove dead copper, pour order 4): 1940,2600 4600,2600 4600,1100 1940,1100

## Keep-outs
Keep-Out Layer:
  the board outline again, w10

## Text inside footprints (layer, text, board x,y; h text height)
AD9288_XP_2019: Top Overlay "LQFP48" at 3650,1960 h34 r270
C5: Bottom Overlay "+" at 3669,1830 h60
C10: Bottom Overlay "+" at 3452,1306 h60 r180
JFPGA: Top Overlay "2" at 4290,1120 h50 r90; Top Overlay "1" at 4393,1124 h50 r90